# Altium PCB J_TAG_PCB.PcbDoc
Units mm, origin at the board's own origin, x right, y up, seen from the top; angles counter-clockwise.
Board outline 118.25 x 45 mm, 4 copper layers (Top Layer, Signal Layer 1, Signal Layer 2, Bottom Layer), stack 0.778 mm thick; 45 components, 42 nets, 217 pads, 110 vias.
Unrouted connection lines stored in the file: 70.
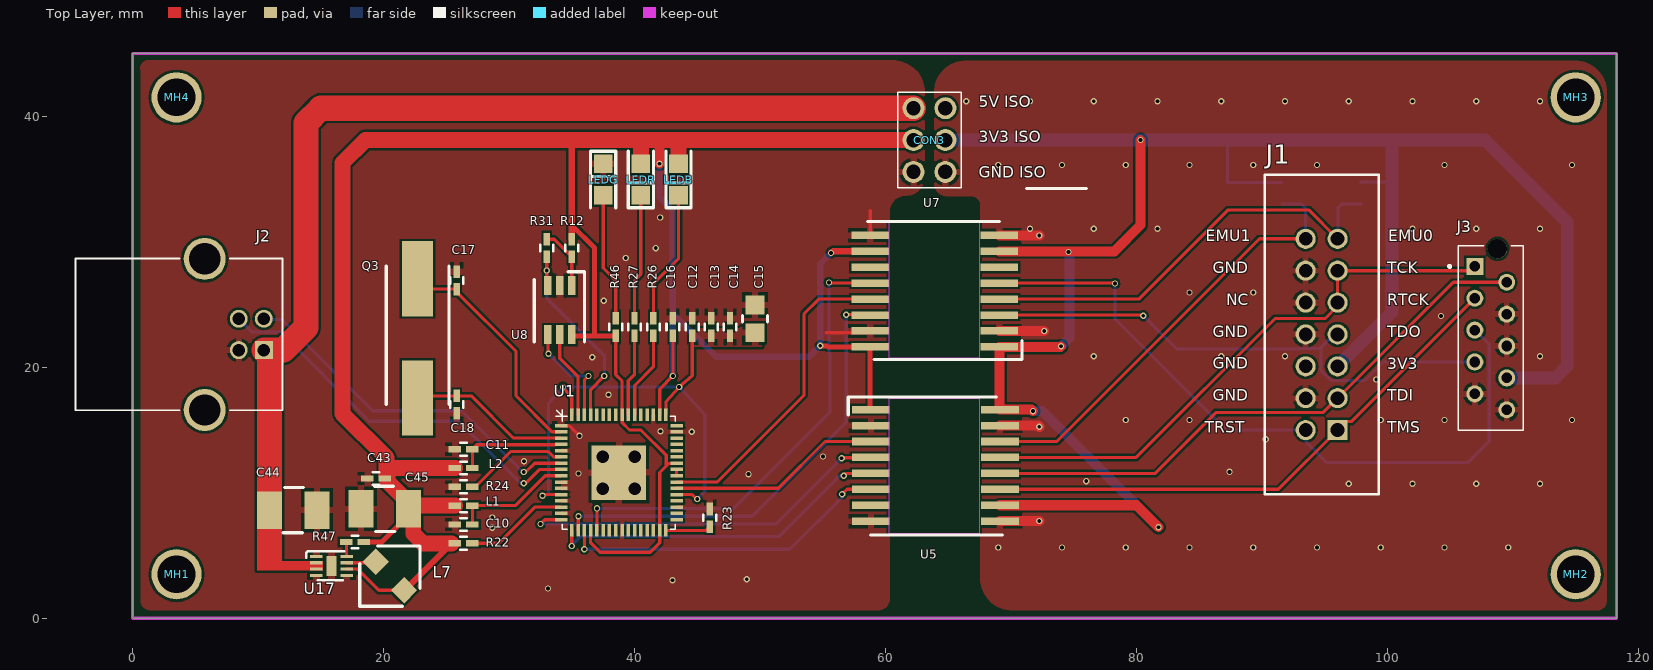
[diagram p0: Top Layer view]
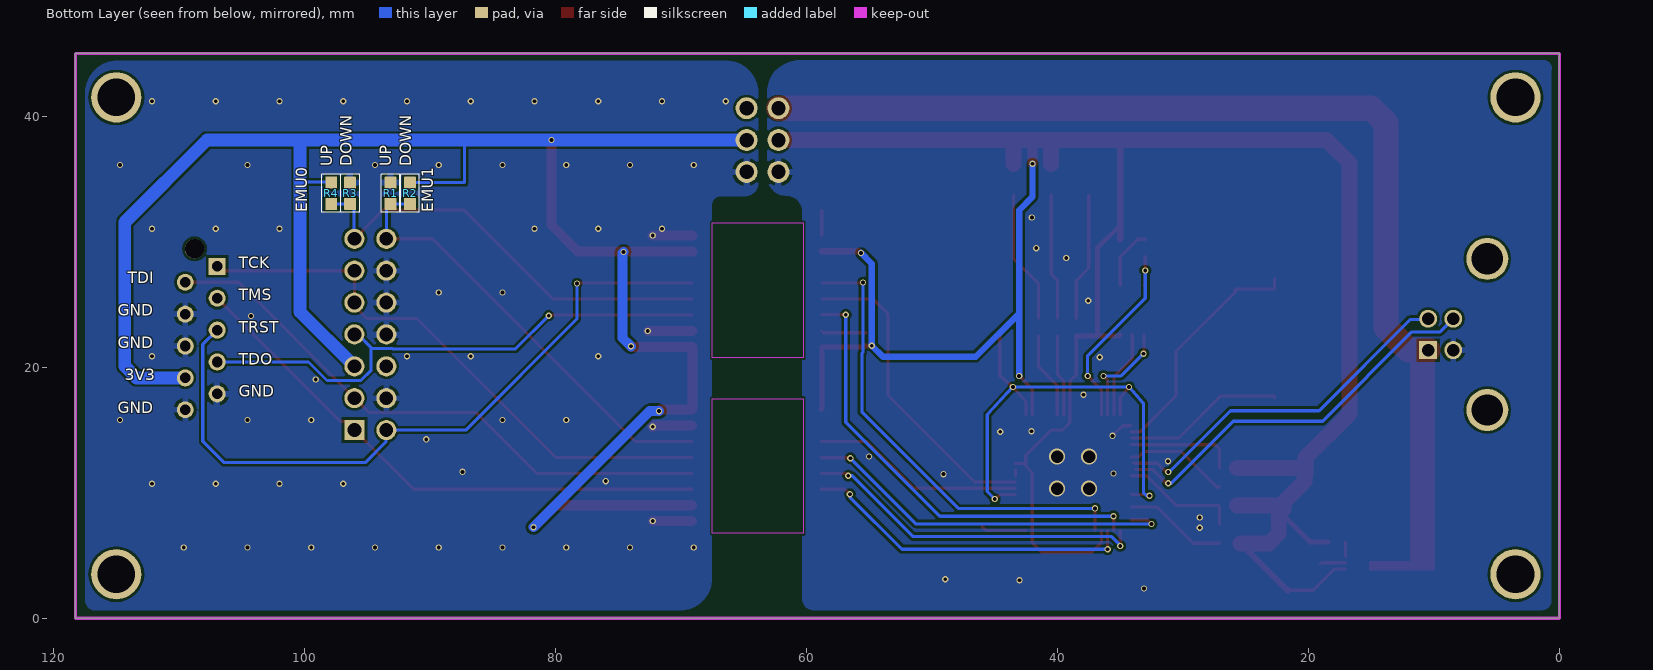
[diagram p1: Bottom Layer view, seen from below]
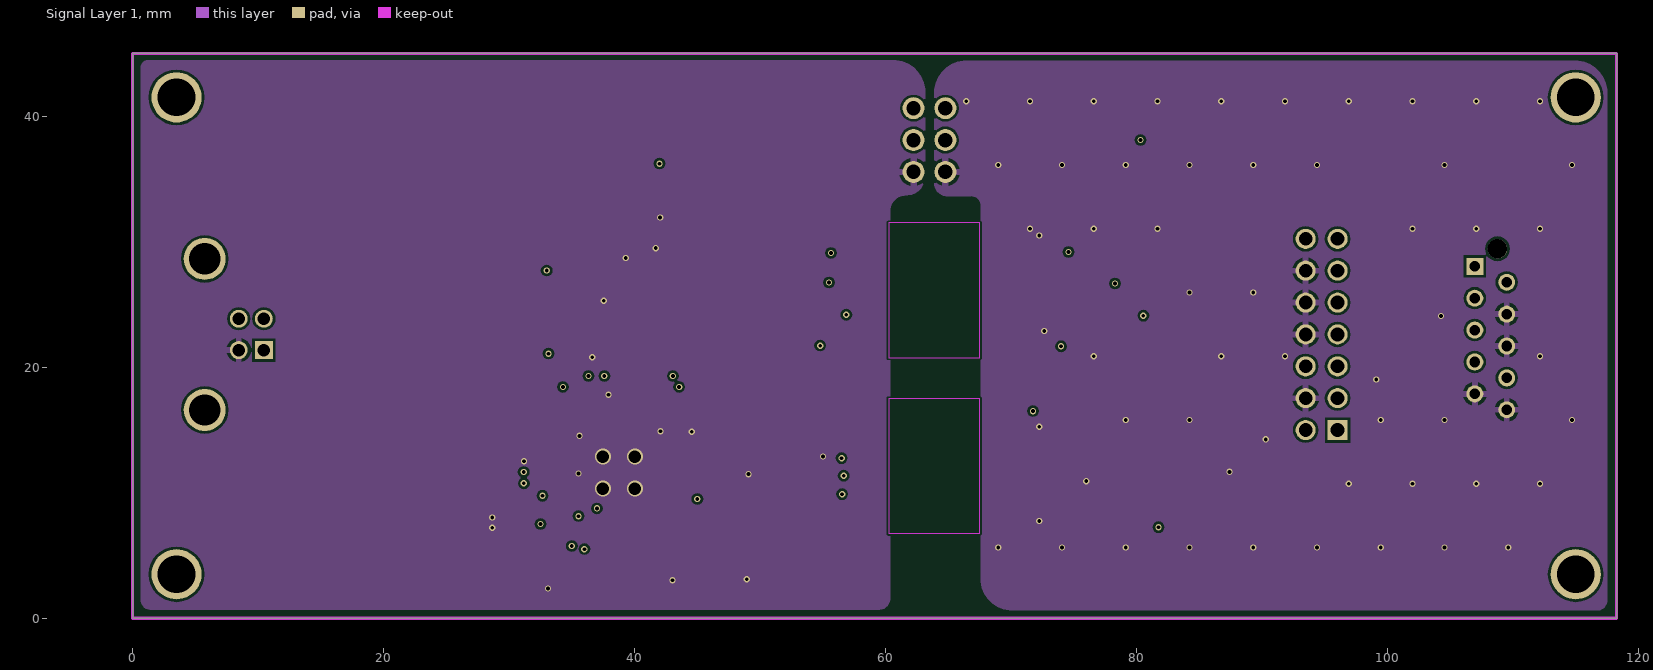
[diagram p2: Signal Layer 1]
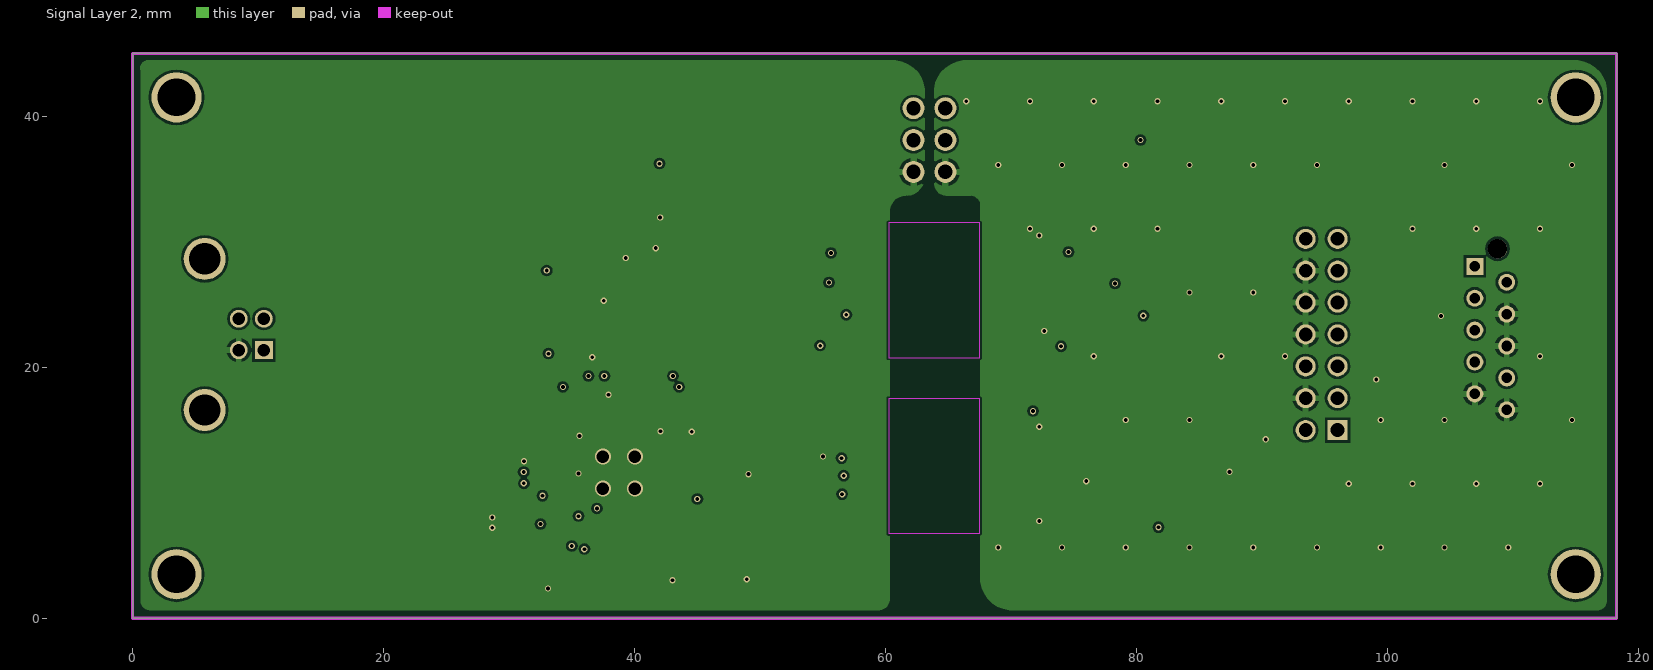
[diagram p3: Signal Layer 2]
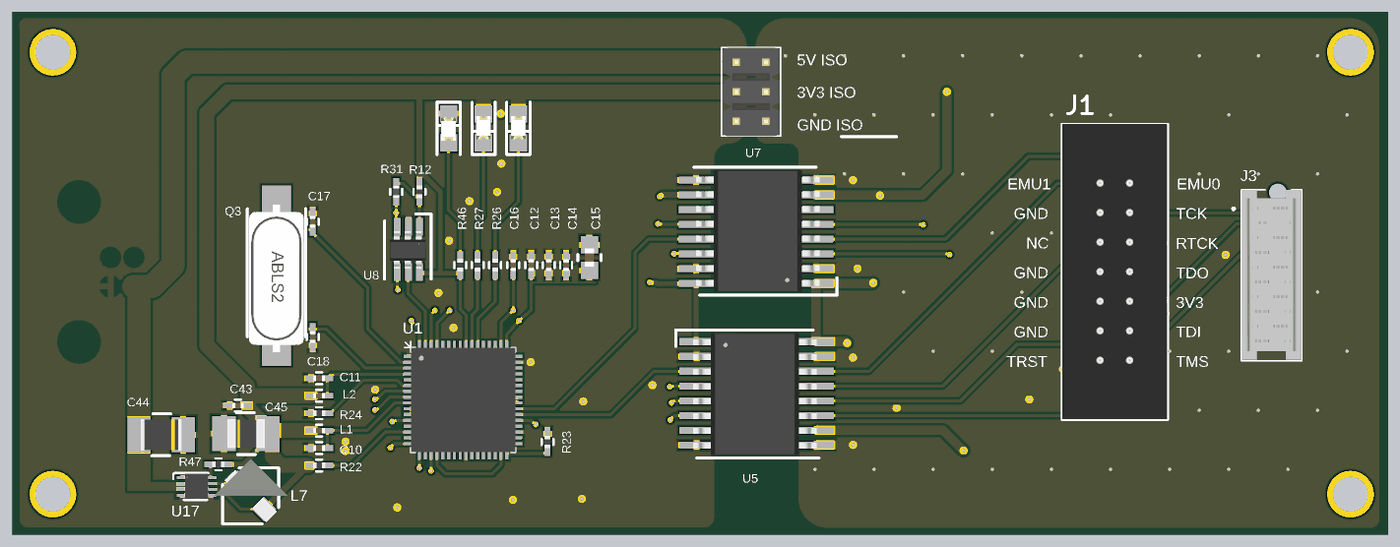
[diagram p4: 3D render of the assembled board from above, using the file's embedded part models]
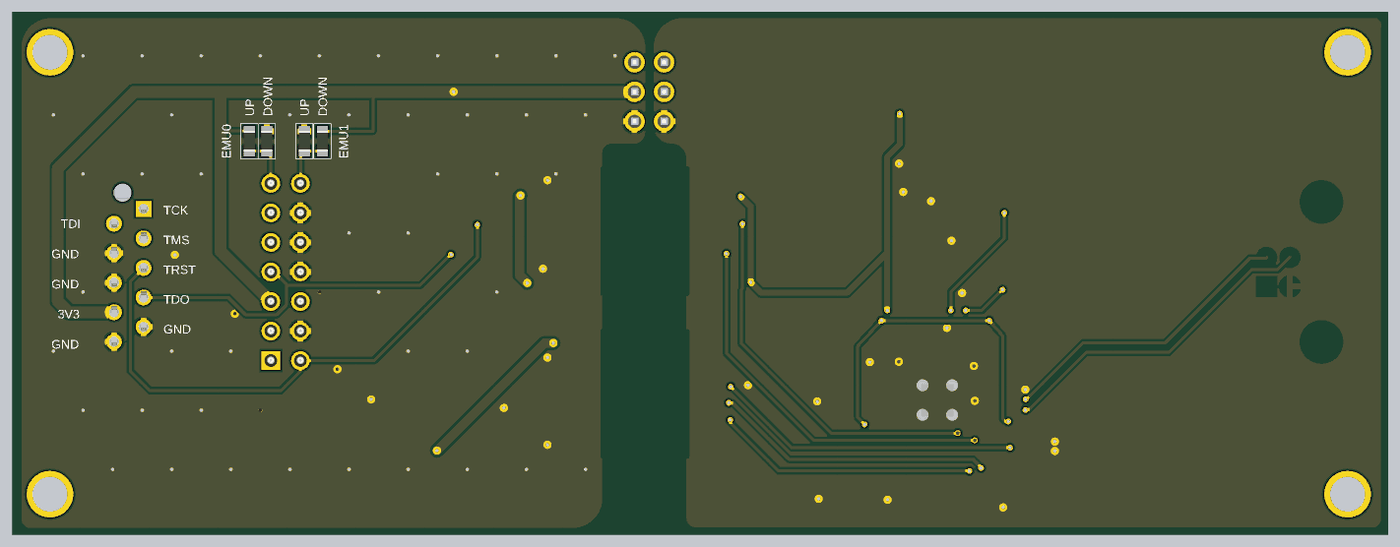
[diagram p5: 3D render of the assembled board from below, using the file's embedded part models]

## Layer stack, top to bottom
Top Solder: solder mask 0.0102, Solder Resist, Dk 3.5
Top Layer: signal copper 0.0356
Dielectric 1: core 0.254, FR-4, Dk 4.2
Signal Layer 1: signal copper 0.036
Dielectric 3: prepreg 0.127, Dk 4.2
Signal Layer 2: signal copper 0.036
Dielectric 2: core 0.254, Dk 4.2
Bottom Layer: signal copper 0.0356
Bottom Solder: solder mask 0.0102, Solder Resist, Dk 3.5

## Board outline
0,0 118.25,0 118.25,45 0,45

## Design rules (kind name [scope] priority, off if disabled: settings)
BoardOutlineClearance [All] p1: gap=0.2 ignorepadtopadclearanceinfootprint=FALSE except(0.4: Arc-SplitBarrior Arc-SplitContinuation Track-SplitBarrior Track-SplitContinuation SMDPad-SplitBarrior SMDPad-SplitContinuation THPad-SplitBarrior THPad-SplitContinuation Via-SplitBarrior Via-SplitContinuation Fill-SplitBarrior Fill-SplitContinuation Poly-SplitBarrior Poly-SplitContinuation Region-SplitBarrior Region-SplitContinuation Text-SplitBarrior Text-SplitContinuation)
Clearance "Clearance Bottom Layer" [OnLayer('Bottom Layer')] p1: gap=0.203 ignorepadtopadclearanceinfootprint=TRUE except(0.254: Arc-Text Track-Text SMDPad-Text THPad-Text Via-Text Fill-Text Poly-Text Region-Text Text-Text)
Clearance "Clearance Top Layer" [OnLayer('Top Layer')] p2: gap=0.203 ignorepadtopadclearanceinfootprint=TRUE except(0.254: Arc-Text Track-Text SMDPad-Text THPad-Text Via-Text Fill-Text Poly-Text Region-Text Text-Text)
Clearance [All] p3: gap=0.2 ignorepadtopadclearanceinfootprint=FALSE except(0.089: Arc-Arc Arc-Track Arc-SMDPad Track-Track Track-SMDPad SMDPad-SMDPad; 0.127: Arc-Via Track-Via SMDPad-Via THPad-Via Via-Via; 0.254: Arc-Text Track-Text SMDPad-Text THPad-Text Via-Text Fill-Text Poly-Text Region-Text Text-Text)
HoleSize [All] p1: absolutevalues=TRUE maxlimit=6.3 minlimit=0.2 maxpercent=80.000 minpercent=20.000
MinimumAnnularRing [All] p1: minimumring=0.076
MinimumSolderMaskSliver [All] p1: minsoldermaskwidth=0.1
PolygonConnect PolygonConnect_1 [All] p1: thpad.connectstyle=Relief thpad.reliefconductorwidth=0.508 thpad.reliefentries=4 thpad.polygonreliefangle="90 Angle" thpad.airgapwidth=0.254 smdpad.connectstyle=Relief smdpad.reliefconductorwidth=0.508 smdpad.reliefentries=4 smdpad.polygonreliefangle="90 Angle" smdpad.airgapwidth=0.254 via.connectstyle=Direct via.reliefconductorwidth=0.508 via.reliefentries=4 via.polygonreliefangle="90 Angle" via.airgapwidth=0.254
RoutingCorners [All] p1: cornerstyle=Round minsetback=2.54 maxsetback=2.54
RoutingVias [All] p1: holewidth=0.3 width=0.5 viastyle="Through Hole" minholewidth=0.3 minwidth=0.5 maxholewidth=0.3 maxwidth=0.5
SilkToSilkClearance [All] p1: silktosilkclearance=0.1
SilkToSolderMaskClearance [IsPad] p1: minsilkscreentomaskgap=0.1 clearancetoexposedcopper=TRUE
SolderMaskExpansion [All] p1: expansion=0.102
Width [All] p1: maxlimit=2.54 minlimit=0.089 preferedwidth=0.381
25 further rules are at their usual default settings.

## Classes and differential pairs
component class Konektori_SCH: CON3 J1 J3 R1 R2 R3 R4 usb
component class J_TAG_SCH: C10 C11 C12 C13 C14 C15 C16 C17 C18 C43 C44 C45 L1 L2 L7 LEDB LEDG LEDR MH1 MH2 MH3 MH4 Q3 R12 R22 R23 R24 R26 R27 R31 R46 R47 U1 U5 U7 U8 U17

## Components (designator, comment, footprint, x,y, rotation, side; value= is the part's Value field where it differs from the comment)
C10 "GRM155R60J475ME47D" GRM155R60J475ME47D 26.378,7.468 r0 top
C11 "GRM155R60J475ME47D" GRM155R60J475ME47D 26.378,13.468 r180 top
C12 "GRM155R61A104KA01D" GRM155R61A104KA01D 44.603,23.2 r270 top
C13 "GRM155R61A104KA01D" GRM155R61A104KA01D 46.103,23.2 r270 top
C14 "GRM155R61A104KA01D" GRM155R61A104KA01D 47.603,23.2 r270 top
C15 "C1608X5R1C335K080AC" C1608X5R1C335K080AC 49.603,23.85 r270 top
C16 "GRM155R61A104KA01D" GRM155R61A104KA01D 43.053,23.2 r270 top
C17 "GRM1555C1H360JA01D" GRM1555C1H360JA01D 25.832,26.924 r270 top
C18 "GRM1555C1H360JA01D" GRM1555C1H360JA01D 25.832,17.018 r90 top
C43 "GRM155R61A104KA01D" GRM155R61A104KA01D 19.406,11.125 r0 top
C44 "GRM32DR71E106KA12L" GRM32DR71E106KA12L 12.802,8.611 r180 top
C45 "GRM32ER61E226KE15L" GRM32ER61E226KE15L 20.096,8.712 r0 top
CON3 "87227-3" 87227-3 62.23,40.64 r270 top
J1 "ED10522-ND" 14_DIP_JTAG 94.75,22.611 r180 top
J2 "USB-B1HSB6" CON_RCPT_USB-B1HSB6 -7.552,25.831 r270 top
J3 "8-215079-0" CON_BTB_F_8-215079-0 106.96,28.037 r90 top
L1 "BLM15AG601SN1D" BLM15AG601SN1D 26.378,8.968 r0 top
L2 "BLM15AG601SN1D" BLM15AG601SN1D 26.378,11.968 r0 top
L7 "CDRH2D18/HPNP-2R2NC" CDRH2D18/HPNP-2R2NC 20.498,3.353 r135 top
LEDB "150080BS75000" 150080BS75000 43.5,35.006 r90 top
LEDG "150080VS75000" 150080VS75000 37.5,34.906 r270 top
LEDR "150080SS75000" 150080SS75000 40.5,35.006 r90 top
MH1 "3mm" MH_3MM 3.5,3.5 r0 top
MH2 "3mm" MH_3MM 115,3.5 r0 top
MH3 "3mm" MH_3MM 115,41.5 r0 top
MH4 "3mm" MH_3MM 3.5,41.5 r0 top
Q3 "ABLS2-12.000MHZ-D4Y-T" ABLS2-12.000MHZ-D4Y-T 22.708,22.047 r270 top
R1 "RC0603FR-071KL" SMD_0603_RES 93.142,33.858 r90 bottom
R2 "RC0603FR-071KL" SMD_0603_RES 91.592,33.858 r90 bottom
R3 "RC0603FR-071KL" SMD_0603_RES 96.368,33.858 r90 bottom
R4 "RC0603FR-071KL" SMD_0603_RES 97.866,33.858 r90 bottom
R12 "RC0402FR-0710KL" RC0402FR-0710KL 35,29.5 r90 top
R22 "RC0402FR-071KL" RC0402FR-071KL 26.378,5.968 r0 top
R23 "RC0402FR-071KL" RC0402FR-071KL 46,8 r90 top
R24 "RC0402FR-0712KL" RC0402FR-0712KL 26.378,10.468 r0 top
R26 "RC0402FR-07680RL" RC0402FR-07680RL 41.5,23.2 r90 top
R27 "RC0402FR-07680RL" RC0402FR-07680RL 40,23.2 r90 top
R31 "CRCW04022K20FKEDC" CRCW04022K20FKEDC 33,29.5 r90 top
R46 "RC0402FR-07680RL" RC0402FR-07680RL 38.5,23.2 r90 top
R47 "RC0402FR-07100KL" RC0402FR-07100KL 17.729,6.071 r0 top
U1 "FT2232HQ-REEL" FT2232HQ-REEL 38.75,11.6 r0 top
U5 "ISO7240CDWR" ISO7240CDWR 63.825,12.119 r0 top
U7 "ISO7231CDWR" ISO7231CDWR 64.075,26.119 r180 top
U8 "93LC56BT-I/OT" 93LC56BT-I/OT 34,24.5 r270 top
U17 "TPS62162DSGT" TPS62162DSGT 15.85,4.216 r0 top

## Footprints (in the part's own frame and the unit in brackets; to place one, negate y for a bottom-side part, rotate by r counter-clockwise, add the part's x,y. Pads: shape width x height; smd on the part's side, far side on the other; paste and mask are expansions set on the pad)
14_DIP_JTAG [mm]
  rect 1.6x1.6 hole 1.1: 1(-1.27,7.62)
  round 1.6 hole 1.1: 2(1.27,7.62) 3(-1.27,5.08) 4(1.27,5.08) 5(-1.27,2.54) 6(1.27,2.54) 7(-1.27,0) 8(1.27,0) 9(-1.27,-2.54) 10(1.27,-2.54) 11(-1.27,-5.08) 12(1.27,-5.08) 13(-1.27,-7.62) 14(1.27,-7.62)
  silkscreen extent -4.55,-12.72 4.55,12.72, body extent -4.5,-12.72 4.5,12.67, height 9.1
93LC56BT-I/OT [mm] "IC EEPROM 2K SPI 2MHZ SOT23-6"
  rect 1.5x0.6 smd: CLK(1.9,-0.9) CS(1.9,0.05) DI(-2,-0.9) DO(-2,1) VCC(1.9,1) VSS(-2,0.05)
  silkscreen extent -3.1,-2 2.5,2, body extent -1.6,-1.55 1.6,1.55, height 1.45
87227-3 [mm] "CONN HEADER VERT 6POS 2.54MM"
  round 1.75 hole 1.15: 1(0,0) 2(0,2.54) 3(2.54,0) 4(2.54,2.54) 5(5.08,0) 6(5.08,2.54)
  silkscreen extent -1.27,-1.27 6.35,3.81, body extent -1.27,-1.14 6.35,3.68, height 8.59
150080BS75000 [mm] "LED BLUE CLEAR 0805 SMD"
  rect 1.5x1.5 smd: A(1.2,0) K(-1.3,0)
  silkscreen extent -2.3,-1 2.2,1, body extent -1,-0.62 1,0.63, height 0.7
150080SS75000 [mm] "LED RED CLEAR 0805 SMD"
  rect 1.5x1.5 smd: A(1.2,0) K(-1.3,0)
  silkscreen extent -2.3,-1 2.2,1, body extent -1,-0.62 1,0.63, height 0.7
150080VS75000 [mm] "LED GREEN CLEAR 0805 SMD"
  rect 1.5x1.5 smd: A(1.2,0) K(-1.3,0)
  silkscreen extent -2.3,-1 2.2,1, body extent -1,-0.62 1,0.63, height 0.7
ABLS2-12.000MHZ-D4Y-T [mm] "CRYSTAL 12.0000MHZ 18PF SMD"
  rect 6x2.5 smd: 1(-5,0) 2(4.5,0)
  silkscreen extent -6,-2.5 5,2.5, body extent -6.35,-2.35 6.35,2.35, height 3.16
BLM15AG601SN1D [mm] "FERRITE BEAD 600 OHM 0402 1LN"
  rect 1x0.5 smd: 1(-0.7,0) 2(0.7,0)
  silkscreen extent -0.25,-0.51 0.25,0.51, body extent -0.5,-0.25 0.5,0.25, height 0.55
C1608X5R1C335K080AC [mm] "CAP CER 3.3UF 16V X5R 0603"
  rect 1.5x1.5 smd: 1(-1.1,0) 2(1.1,0)
  silkscreen extent -0.25,-1 0.26,1, body extent -0.8,-0.4 0.8,0.4, height 0.9
CDRH2D18/HPNP-2R2NC [mm] "FIXED IND 2.2UH 1.9A 60 MOHM SMD"
  rect 1.5x1.5 smd: 1(-1.6,0) 2(1.6,0)
  silkscreen extent -2.4,-3.4 2.4,3.4, body extent -2.55,-0.65 2.55,0.65, height 1.51
CON_BTB_F_8-215079-0 [mm]
  rect 1.358x1.358 hole 0.85: 1(0,0)
  round 1.358 hole 0.85: 2(-1.27,-2.54) 3(-2.54,0) 4(-3.81,-2.54) 5(-5.08,0) 6(-6.35,-2.54) 7(-7.62,0) 8(-8.89,-2.54) 9(-10.16,0) 10(-11.43,-2.54)
  round 1.55 hole 1.55 unplated: ""(1.4,-1.8)
  silkscreen extent -13.07,-3.87 1.64,2.11, body extent -12.97,-3.74 1.64,1.26, height 4.2
CON_RCPT_USB-B1HSB6 [mm]
  rect 1.428x1.428 hole 1: 1(4.47,18.01)
  round 1.428 hole 1: 2(1.97,18.01) 3(1.97,16.01) 4(4.47,16.01)
  round 3.346 hole 2.5: P1(-2.8,13.3) P2(9.24,13.3)
  silkscreen extent -2.83,3 9.27,19.5, body extent -4.12,3.15 10.72,19.65, height 10.9
CRCW04022K20FKEDC [mm] "RES SMD 2.2K OHM 1% 1/16W 0402"
  rect 1x0.5 smd: 1(-0.7,0) 2(0.7,0)
  silkscreen extent -0.25,-0.51 0.25,0.51, body extent -0.5,-0.25 0.5,0.25, height 0.35
FT2232HQ-REEL [mm] "IC USB HS DUAL UART/FIFO 64-QFN"
  rect 0.28x1 smd mask+0.06: ACBUS0(0.75,-4.6) ACBUS1(1.25,-4.6) ACBUS2(1.75,-4.6) ACBUS3(2.25,-4.6) ACBUS4(2.75,-4.6) ACBUS5(3.75,-4.6) ADBUS1(-3.75,-4.6) ADBUS2(-3.25,-4.6) ADBUS3(-2.75,-4.6) ADBUS4(-1.75,-4.6) ADBUS5(-1.25,-4.6) ADBUS6(-0.75,-4.6) ADBUS7(-0.25,-4.6) BCBUS1(2.25,4.6) BCBUS2(1.75,4.6) BCBUS3(1.25,4.6) BCBUS4(0.75,4.6) BCBUS5(-0.25,4.6) BCBUS6(-0.75,4.6) BCBUS7(-1.25,4.6) EECLK(-2.75,4.6) EECS(-3.25,4.6) EEDATA(-2.25,4.6) GND5(0.25,-4.6) GND8(2.75,4.6) PWREN#(-1.75,4.6) VCCIO1(-2.25,-4.6) vccio2(3.25,-4.6) VCCIO4(0.25,4.6) VCORE3(-3.75,4.6) VREGIN(3.25,4.6) VREGOUT(3.75,4.6)
  rect 1x0.28 smd mask+0.06: ACBUS6(4.6,-3.75) ACBUS7(4.6,-3.25) ADBUS0(-4.6,-3.75) AGND(-4.6,-0.75) BCBUS0(4.6,3.75) BDBUS0(4.6,-1.25) BDBUS1(4.6,-0.75) BDBUS2(4.6,-0.25) BDBUS3(4.6,0.25) BDBUS4(4.6,1.25) BDBUS5(4.6,1.75) BDBUS6(4.6,2.25) BDBUS7(4.6,2.75) GND1(-4.6,3.75) GND2(-4.6,1.75) GND3(-4.6,-1.25) GND4(-4.6,-3.25) GND6(4.6,-2.75) GND7(4.6,3.25) OSCI(-4.6,3.25) OSCO(-4.6,2.75) REF(-4.6,1.25) RESET#(-4.6,-2.75) SUSPEND#(4.6,-2.25) TEST(-4.6,-2.25) USBDM(-4.6,0.75) USBDP(-4.6,0.25) VCCIO3(4.6,0.75) VCORE1(-4.6,-1.75) VCORE2(4.6,-1.75) VPHY(-4.6,2.25) VPLL(-4.6,-0.25)
  rect 4.35x4.35 smd paste-3 mask+0.06: TH(0,0)
  silkscreen extent -5.02,-4.5 4.5,5.02, body extent -4.5,-4.5 4.5,4.5, height 0.89
GRM32DR71E106KA12L [mm] "CAP CER 10UF 25V X7R 1210"
  rect 2x3 smd: 1(-1.9,0) 2(1.9,0)
  silkscreen extent -0.82,-1.8 0.8,1.8, body extent -1.75,-1.35 1.75,1.35, height 2.21
GRM32ER61E226KE15L [mm] "CAP CER 22UF 25V X5R 1210"
  rect 2x3 smd: 1(-1.9,0) 2(1.9,0)
  silkscreen extent -0.82,-1.8 0.8,1.8, body extent -1.6,-1.24 1.6,1.25, height 2.79
GRM155R60J475ME47D [mm] "CAP CER 4.7UF 6.3V X5R 0402"
  rect 1x0.5 smd: 1(-0.7,0) 2(0.7,0)
  silkscreen extent -0.25,-0.51 0.25,0.51, body extent -0.5,-0.25 0.5,0.25, height 0.6
GRM155R61A104KA01D [mm] "CAP CER 0.1UF 10V X5R 0402"
  rect 1x0.5 smd: 1(-0.7,0) 2(0.7,0)
  silkscreen extent -0.25,-0.51 0.25,0.51, body extent -0.5,-0.25 0.5,0.25, height 0.55
GRM1555C1H360JA01D [mm] "CAP CER 36PF 50V C0G/NP0 0402"
  rect 1x0.5 smd: 1(-0.7,0) 2(0.7,0)
  silkscreen extent -0.25,-0.51 0.25,0.51, body extent -0.5,-0.25 0.5,0.25, height 0.55
ISO7231CDWR [mm] "Izolator"
  rect 3x0.6 smd: EN1(-5,-3.12) EN2(5.3,-3.12) GND1(-5,3.23) GND1(-5,-4.39) GND2(5.3,3.23) GND2(5.3,-4.39) INA(-5,1.96) INB(-5,0.69) INC(5.3,-0.58) NC1(-5,-1.85) NC2(5.3,-1.85) OUTA(5.3,1.96) OUTB(5.3,0.69) OUTC(-5,-0.58) VCC1(-5,4.5) VCC2(5.3,4.5)
  silkscreen extent -6.8,-5.5 5.5,5.5, body extent -5.32,-5.24 5.32,5.25, height 2.64
ISO7240CDWR [mm] "Izolator"
  rect 3x0.6 smd: EN(5.3,-3.12) GND1(-5,-4.39) GND1(-5,3.23) GND2(5.3,-4.39) GND2(5.3,3.23) INA(-5,1.96) INB(-5,0.69) INC(-5,-0.58) IND(-5,-1.85) NC(-5,-3.12) OUTA(5.3,1.96) OUTB(5.3,0.69) OUTC(5.3,-0.58) OUTD(5.3,-1.85) VCC1(-5,4.5) VCC2(5.3,4.5)
  silkscreen extent -6.8,-5.5 5.5,5.5, body extent -5.32,-5.24 5.32,5.25, height 2.64
MH_3MM [mm]
  round 4 hole 3: ""(0,0)
RC0402FR-071KL [mm] "RES SMD 1K OHM 1% 1/16W 0402"
  rect 1x0.5 smd: 1(-0.7,0) 2(0.7,0)
  silkscreen extent -0.25,-0.51 0.25,0.51, body extent -0.53,-0.25 0.53,0.25, height 0.71
RC0402FR-0710KL [mm] "RES SMD 10K OHM 1% 1/16W 0402"
  rect 1x0.5 smd: 1(-0.7,0) 2(0.7,0)
  silkscreen extent -0.25,-0.51 0.25,0.51, body extent -0.53,-0.25 0.53,0.25, height 0.71
RC0402FR-0712KL [mm] "RES SMD 12K OHM 1% 1/16W 0402"
  rect 1x0.5 smd: 1(-0.7,0) 2(0.7,0)
  silkscreen extent -0.25,-0.51 0.25,0.51, body extent -0.53,-0.25 0.53,0.25, height 0.71
RC0402FR-07100KL [mm] "RES SMD 100K OHM 1% 1/16W 0402"
  rect 1x0.5 smd: 1(-0.7,0) 2(0.7,0)
  silkscreen extent -0.25,-0.51 0.25,0.51, body extent -0.53,-0.25 0.53,0.25, height 0.71
RC0402FR-07680RL [mm] "RES SMD 680 OHM 1% 1/16W 0402"
  rect 1x0.5 smd: 1(-0.7,0) 2(0.7,0)
  silkscreen extent -0.25,-0.51 0.25,0.51, body extent -0.53,-0.25 0.53,0.25, height 0.71
SMD_0603_RES [mm]
  rrect10% 0.95x0.95 smd: 1(-0.85,0) 2(0.85,0)
  silkscreen extent -1.5,-0.75 1.5,0.75, body extent -0.87,-0.48 0.87,0.47, height 0.55
TPS62162DSGT [mm] "DC-DC Buck"
  rect 1x0.25 smd mask+0.06: AGND(-1.2,-0.8) EN(-1.2,-0.3) FB(1.2,-0.8) PG(1.2,0.7) PGND(-1.2,0.7) SW(1.2,0.2) VIN(-1.2,0.2) VOS(1.2,-0.3)
  rect 0.8x1.6 smd: EX_PAD(0,-0.05)
  silkscreen extent -2,-1.2 1,1.1, body extent -1.05,-1.05 1.05,1.05, height 0.8

## Part data
C10 C11: "C10, C11", Supplier Part Number 1=490-5915-1-ND, Supplier 1=Digi-Key
C12 C13 C14 C16 C43: "C12, C13, C14, C16, C43", Supplier Part Number 1=490-1318-6-ND, Supplier 1=Digi-Key
C15: "C15", Supplier Part Number 1=445-7476-6-ND, Supplier 1=Digi-Key
C17 C18: "C17, C18", Supplier Part Number 1=490-6044-6-ND, Supplier 1=Digi-Key
C44: "C41, C44, 10u", Supplier Part Number 1=490-1867-6-ND, Supplier 1=Digi-Key
C45: "C45", Supplier Part Number 1=490-3889-6-ND, Supplier 1=Digi-Key
CON3: "Heder, 3x2, M", Supplier Part Number 1=A26569-ND, Supplier 1=Digi-Key
J1: library part "CONN_JTAG_Boxheader 14-pol", "CONN HEADER VERT 14POS 2.54MM", Color=Black, Manufacturer="On-Shore Technology", Manufacturer Part Number=302-S141, Category=Connectors, ComponentLink1Description=https://datasheet.ciiva.com/742/302-sxxx-742188.pdf?src-supplier=Digi-Key, ComponentLink1URL=https://datasheet.ciiva.com/742/302-sxxx-742188.pdf?src-supplier=Digi-Key, Connector Type="Male Pin", Contact Plating=Gold, Mount="Through Hole", Number of Positions=14, Number of Rows=2, Packaging=Tray, Pitch=0.1inch, Pricing 1="1=0,32000, 10=0,27400, 200=0,21280, 600=0,18240, 1000=0,15200, 5000=0,13029, 10000=0,12160 (USD)", RoHS=Yes, Row Spacing=0.1inch, Stock 1=34434, Supplier 1=Digi-Key, Supplier Part Number 1=ED10522-ND, Termination=Solder
J2: library part CON_RCTB_USB-B1HSB6, "CONN RCPT TYPEB 4POS R/A", Manufacturer="On-Shore Technology", Package Quantity=50, Supplier Part Number 1=ED2983-ND, Category=Connectors, ComponentLink1Description=https://datasheet.ciiva.com/851/usb-b1hsxx-851167.pdf?src-supplier=Digi-Key, ComponentLink1URL=https://datasheet.ciiva.com/851/usb-b1hsxx-851167.pdf?src-supplier=Digi-Key, Connector Type=USB, Gender=Receptacle, Manufacturer Part Number=USB-B1HSB6, Mount="Through Hole,Horizontal", Number of Contacts=4, Packaging=Tray, Pricing 1="1=0,61000, 10=0,53300, 25=0,48720, 40=0,45875, 117=0,43957, 234=0,40132, 468=0,38220, 1053=0,31532, 2457=0,28665 (USD)", RoHS=Yes, Stock 1=7174, Supplier 1=Digi-Key
J3: library part CON_BTB_F_8-215079-0, "CONN FMALE-ON-BRD 10POS VERT T/H", Color=Red, Contact Current Rating=1.5A, Contact Resistance=10mR, Flammability Rating="UL94 V-0", Insulation Resistance=1GR, Manufacturer="TE Connectivity", Max Operating Temperature=105°C, Min Operating Temperature=-40°C, Package Quantity=250, Supplier Part Number 1=A99470CT-ND, Voltage Rating=230V, Voltage Rating (DC)=100V, Board Standoff="No (Without)", Category="Headers and Wire Housings", ComponentLink1Description=https://datasheet.ciiva.com/11745/0900766b8101108b-11745837.pdf?src-supplier=RSComponents, ComponentLink1URL=https://datasheet.ciiva.com/11745/0900766b8101108b-11745837.pdf?src-supplier=RSComponents, ComponentLink2Description=https://datasheet.ciiva.com/5723/493968-5723952.pdf?src-supplier=Farnell, ComponentLink2URL=https://datasheet.ciiva.com/5723/493968-5723952.pdf?src-supplier=Farnell, ComponentLink3Description=https://datasheet.ciiva.com/25908/eng-cs-82012-ribbon-cable-interconnect-sol-0412-25908056.pdf?src-supplier=Avnet+Europe, ComponentLink3URL=https://datasheet.ciiva.com/25908/eng-cs-82012-ribbon-cable-interconnect-sol-0412-25908056.pdf?src-supplier=Avnet+Europe, ComponentLink4Description=https://datasheet.ciiva.com/30057/eng-cat-889409-0699-96-30057720.pdf?src-supplier=Onlinecomponents.com, ComponentLink4URL=https://datasheet.ciiva.com/30057/eng-cat-889409-0699-96-30057720.pdf?src-supplier=Onlinecomponents.com, ComponentLink5Description=https://datasheet.ciiva.com/754/eng-cd-215079-y-754233.pdf?src-supplier=Digi-Key, ComponentLink5URL=https://datasheet.ciiva.com/754/eng-cd-215079-y-754233.pdf?src-supplier=Digi-Key, ComponentLink6Description=https://datasheet.ciiva.com/14156/mo215079-128482-90-dat-en-14156698.pdf?src-supplier=Distrelec, ComponentLink6URL=https://datasheet.ciiva.com/14156/mo215079-128482-90-dat-en-14156698.pdf?src-supplier=Distrelec, ComponentLink7Description=https://datasheet.ciiva.com/754/eng-cd-215079-y-754187.pdf?src-supplier=Digi-Key, ComponentLink7URL=https://datasheet.ciiva.com/754/eng-cd-215079-y-754187.pdf?src-supplier=Digi-Key, ComponentLink8Description=https://datasheet.ciiva.com/43491/747833-da-01-en-federleiste-gerade-10pol-43491941.pdf?src-supplier=Conrad, ComponentLink8URL=https://datasheet.ciiva.com/43491/747833-da-01-en-federleiste-gerade-10pol-43491941.pdf?src-supplier=Conrad, Connector System=Board-to-Board, Connector Type=Receptacle,Connector,Pin, Contact Material=Bronze, Contact Plating=Tin, Contact Post Length=0.122inch, Current Rating=1.5A, Depth=5.1mm, ELV=Compliant, Fastening Type=Push,Pull, Gender=Receptacle, Height=0.16inch, Housing Color=Red, Housing Material=Polyester, Insulation Color=Red, Insulation Material=PBT, Length=14.7mm, Manufacturer Part Number=8-215079-0, Mating Alignment="No (Without)", Mating Retention="No (Without)", Mount="Through Hole", Number of Contacts=10, Number of Pins=10, Number of Positions=10, Number of Rows=2, Orientation=Straight, Packaging=Box, PCB Mount Alignment="No (Without)", PCB Mount Retention=With, PCB Mounting Orientation=Vertical, Pitch=0.05inch, Plating Thickness=0.005um, Pricing 1="1=1.51000, 10=1.37400, 100=1.17800 (USD)", Radiation Hardening=No, REACH SVHC="No SVHC", RoHS=Yes, Row Spacing=0.1inch, Shrouded="Yes (With)", Stock 1=3227, Supplier 1=Digi-Key, Termination="Through Hole", Width=14.7mm, Working Voltage=100V
L1 L2: "L1, L2", Supplier Part Number 1=490-1006-6-ND, Supplier 1=Digi-Key
L7: "L7", Supplier Part Number 1=308-2295-6-ND, Supplier 1=Digi-Key
LEDB: library part 150080BS75000onent_1, "BLUE LED", Supplier Part Number 1=732-4982-6-ND, Supplier 1=Digi-Key
LEDG: "GREEN LED", Supplier Part Number 1=732-4986-6-ND, Supplier 1=Digi-Key
LEDR: "RED LED", Supplier Part Number 1=732-4985-6-ND, Supplier 1=Digi-Key
MH1 MH2 MH3 MH4: library part TH_3MM, "odsojnik"
Q3: "Oscilator 12MHz", Supplier Part Number 1=535-9869-6-ND, Supplier 1=Digi-Key
R1 R2 R3 R4: library part RES_0603_1K_1%_1/10W, "RES SMD 1K OHM 1% 1/10W 0603", Case Code (Imperial)=0603, Case Code (Metric)=1608, Manufacturer=Yageo, Max Operating Temperature=155°C, Max Power Dissipation=100mW, Min Operating Temperature=-55°C, Resistance=1kR, Resistance Tolerance=1%, Resistor Type="Thick Film", Supplier Part Number 1=311-1.00KHRCT-ND, Temperature Coefficient=100ppm/°C, Voltage Rating=50V, Case/Package=0603, Category="Chip SMD Resistors", ComponentLink1Description=https://datasheet.ciiva.com/11808/0900766b80f96399-11808081.pdf?src-supplier=RSComponents, ComponentLink1URL=https://datasheet.ciiva.com/11808/0900766b80f96399-11808081.pdf?src-supplier=RSComponents, ComponentLink2Description=https://datasheet.ciiva.com/25906/pyu-rc0603-51-rohs-l-4-25906933.pdf?src-supplier=Avnet+Europe, ComponentLink2URL=https://datasheet.ciiva.com/25906/pyu-rc0603-51-rohs-l-4-25906933.pdf?src-supplier=Avnet+Europe, ComponentLink3Description=https://datasheet.ciiva.com/7660/1868787-7660790.pdf?src-supplier=Element14, ComponentLink3URL=https://datasheet.ciiva.com/7660/1868787-7660790.pdf?src-supplier=Element14, ComponentLink4Description=https://datasheet.ciiva.com/7746/1738695-7746279.pdf?src-supplier=Element14, ComponentLink4URL=https://datasheet.ciiva.com/7746/1738695-7746279.pdf?src-supplier=Element14, ComponentLink5Description=https://datasheet.ciiva.com/7746/1686128-7746280.pdf?src-supplier=Element14, ComponentLink5URL=https://datasheet.ciiva.com/7746/1686128-7746280.pdf?src-supplier=Element14, ComponentLink6Description=https://datasheet.ciiva.com/28386/pyu-rc0603-51-rohs-l-4-28386648.pdf?src-supplier=Avnet+Europe, ComponentLink6URL=https://datasheet.ciiva.com/28386/pyu-rc0603-51-rohs-l-4-28386648.pdf?src-supplier=Avnet+Europe, ComponentLink7Description=https://datasheet.ciiva.com/7746/1738695-7746281.pdf?src-supplier=Element14, ComponentLink7URL=https://datasheet.ciiva.com/7746/1738695-7746281.pdf?src-supplier=Element14, ComponentLink8Description=https://datasheet.ciiva.com/8896/pyu-rc0603-51-rohs-l-4-8896106.pdf?src-supplier=Avnet, ComponentLink8URL=https://datasheet.ciiva.com/8896/pyu-rc0603-51-rohs-l-4-8896106.pdf?src-supplier=Avnet, ComponentLink9Description=https://datasheet.ciiva.com/15189/getdatasheetpartid-404327-15189644.pdf?src-supplier=Verical, ComponentLink9URL=https://datasheet.ciiva.com/15189/getdatasheetpartid-404327-15189644.pdf?src-supplier=Verical, ComponentLink10Description=https://datasheet.ciiva.com/7983/443971-7983613.pdf?src-supplier=Element14, ComponentLink10URL=https://datasheet.ciiva.com/7983/443971-7983613.pdf?src-supplier=Element14, Construction=Rectangular, Contact Plating=Tin,Matte, Depth=0.8mm, Features="Moisture Resistant", Height=0.45mm, Lead Free="Lead Free", Length=1.6mm, Manufacturer Part Number=RC0603FR-071KL, Military Standard=Not, Number of Terminations=2, Packaging="Tape and Reel", Power Rating=100mW, Pricing 1="1=0.10000, 10=0.02300, 100=0.00930, 1000=0.00417, 2500=0.00362 (USD)", Radiation Hardening=No, REACH SVHC="No SVHC", RoHS=Yes, RoHS Compliant=Yes, Series=RC, Size Code=0603, Stock 1=24609199, Supplier 1=Digi-Key, Technology="THICK FILM", Termination=SMD/SMT, Tolerance=1%
R12: "R12, 10K", Supplier Part Number 1=311-10.0KLRDKR-ND, Supplier 1=Digi-Key
R22 R23: "R22, R23, 1K", Supplier Part Number 1=311-1.00KLRDKR-ND, Supplier 1=Digi-Key
R24: Supplier Part Number 1=311-12.0KLRDKR-ND, Supplier 1=Digi-Key
R26 R27 R46: "R26, R27, R46, RC0402FR-07680RL", Supplier Part Number 1=311-680LRDKR-ND, Supplier 1=Digi-Key
R31: "R31", Supplier Part Number 1=541-3971-6-ND, Supplier 1=Digi-Key
R47: "R47, 100K", Supplier Part Number 1=311-100KLRDKR-ND, Supplier 1=Digi-Key
U1: "IC kontroler", Supplier Part Number 1=768-1025-6-ND, Supplier 1=Digi-Key
U5: "Izolator", Supplier Part Number 1=296-38555-6-ND, Supplier 1=Digi-Key
U7: "Izolator", Supplier Part Number 1=296-38966-6-ND, Supplier 1=Digi-Key
U8: "IC memorija", Supplier Part Number 1=93LC56BT-I/OTDKR-ND, Supplier 1=Digi-Key
U17: "DC-DC Buck", Supplier Part Number 1=296-29897-1-ND, Supplier 1=Digi-Key

## Via types
v1: diameter 0.5, hole 0.3, Top Layer to Bottom Layer, 58 vias
v2: diameter 0.5, hole 0.3, Top Layer to Bottom Layer, tented both sides, 48 vias
v3: diameter 1.27, hole 1, Top Layer to Bottom Layer, 4 vias

## Nets (pads, with @x,y where several pads share a name; then routed paths per layer and width w, separated by ;. In a path a pad name is that pad's centre, name@x,y a point inside that pad or via, vN(x,y) a via of type N, cw(c..) or ccw(c..) an arc to the next point about the centre after c; other vN are vias at no path point)
+3V3: CON3.4 J1.5 J3.8 R2.2 R4.2 U5.EN U5.VCC2 U7.EN1 U7.VCC1 | length 165.7
  Top Layer w0.8: U7.EN1 78.239,29.239 80.325,31.325 80.325,38.091 v1(80.316,38.1) ; U5.EN 80.001,8.999 v1(81.75,7.25) ; v1(71.75,16.5) 71.631,16.619 U5.VCC2 69.075,16.669 U7.VCC1 73.943,21.619 v1(73.99,21.666)
  Bottom Layer w0.254: 87.249,38.1 87.249,34.708 R2.2 ; 91.592,38.024 91.669,38.1 ; 97.841,38.1 97.866,38.075 ; R4.2 97.905,34.747 100.355,34.747
  Bottom Layer w0.8: v1(71.75,16.5) 72.5,16.5 v1(81.75,7.25) ; v1(73.99,21.666) 74.651,22.327 74.651,29.108 v1(74.574,29.185)
  Bottom Layer w1.016: CON3.4 v1(80.316,38.1) 87.249,38.1 91.669,38.1 97.841,38.1 100.355,38.1 ; J1.5 100.355,24.407 100.355,34.747 100.355,38.1 ; J3.8 113.381,19.147 114.325,20.091 114.325,31.547 107.772,38.1 100.355,38.1
+5V: CON3.2 | length 0.1
  Top Layer w0.8: CON3.2 CON3.2@64.829,40.699
AGND: C10.1 C11.2 C12.1 C13.1 C14.1 C15.1 C16.1 C17.1 C18.1 C43.1 C44.1 C45.1 CON3.5 J2.4 LEDG.K R23.2 R24.1 U1.AGND U1.GND1 U1.GND2 U1.GND3 U1.GND4 U1.GND5 U1.GND6 U1.GND7 U1.GND8 U1.TEST U1.TH U5.GND1 U7.GND2 U8.VSS U17.AGND U17.EX_PAD U17.FB U17.PGND | length 7.4
  Top Layer w0.254: U1.GND1 34.163,15.337 34.803,15.337 v1(35.611,14.529) ; 55.25,22.75 58.636,22.75 U7.GND2@58.775,22.889 ; 58.75,32.5 58.775,32.475 U7.GND2@58.775,30.509
  other v1: 33.096,2.362 43.028,3.023 48.946,3.099 28.651,7.214 28.651,8.026 49.073,11.481 35.535,11.532 31.191,12.497 55.016,12.878 44.549,14.858 42.063,14.892 37.922,17.805 36.627,20.803 37.541,25.298 39.294,28.702 41.681,29.489 42.037,31.928
  other v3: 37.48,10.33 40.02,10.33 37.48,12.87 40.02,12.87
D+: J2.3 U1.USBDP | length 31.2
  Top Layer w0.254: v1(31.177,10.744) 31.322,10.744 32.419,11.842 U1.USBDP@33.791,11.842
  Bottom Layer w0.254: J2.3 9.502,22.817 11.752,22.817 18.872,15.697 25.984,15.697 30.937,10.744 v1(31.177,10.744)
D-: J2.2 U1.USBDM | length 28.8
  Top Layer w0.254: v1(31.166,11.651) 31.336,11.651 32.035,12.35 U1.USBDM@33.932,12.35
  Bottom Layer w0.254: J2.2 10.516,23.804 11.883,23.804 19.152,16.535 26.205,16.535 31.09,11.651 v1(31.166,11.651)
"FTDI 1V8": C12.2 C13.2 C14.2 C15.2 U1.VCORE1 U1.VCORE2 U1.VCORE3 U1.VREGOUT | length 41.7
  Top Layer w0.254: v1(32.664,9.754) 32.761,9.85 U1.VCORE1 ; v1(34.29,18.431) 35,17.568 U1.VCORE3 ; U1.VREGOUT 42.5,17.227 v1(43.552,18.431) 44.603,19.33 C12.2 ; U1.VCORE2 44.583,9.85 44.933,9.5 v1(45,9.5)
  Bottom Layer w0.254: v1(32.664,9.754) 32.893,9.754 33.147,10.008 33.147,17.136 v1(34.29,18.431) v1(43.552,18.431) 45.593,16.237 45.593,10.093 v1(45,9.5)
"FTDI 3V3": C16.2 C43.2 C45.2 CON3.3 L1.1 L2.1 L7.1 LEDB.A LEDR.A R12.2 R22.1 R46.1 R47.2 U1.VCCIO1 U1.vccio2 U1.VCCIO3 U1.VCCIO4 U1.VREGIN U5.VCC1 U7.EN2 U7.VCC2 U8.VCC U17.VOS | length 218.8
  Top Layer w0.254: U17.VOS 17.052,3.914 17.93,3.914 19.623,2.221 L7.1 ; U1.VCCIO1 36.5,6 37.25,5.25 41.25,5.25 42,6 U1.vccio2 42,11.607 42.52,12.127 ; R46.1 38.5,19.412 39,18.912 U1.VCCIO4 39.013,16.187 39.013,15.58 39.593,15 40.5,15 42.52,12.98 42.52,12.127 ; U1.VREGIN 42,18.251 v1(43.053,19.304) C16.2 ; U1.VCCIO3 43.337,12.337 42.73,12.337 42.52,12.127
  Top Layer w0.4: R47.2 19.855,6.071 22.252,8.468 C45.2@22.252,8.968 ; U8.VCC 35.1,22.5 36.8,22.5 ; 35,31.318 36.8,29.518 36.8,22.5 ; R46.1 36.8,22.5 ; v1(54.788,21.717) 54.807,21.698 55.322,21.698 55.401,21.619 U7.VCC2 58.775,16.669 U5.VCC1
  Top Layer w0.5: L7.1 21.682,2.221 25.428,5.968 R22.1
  Top Layer w0.508: 34.976,38.1 35,38.076 35,31.318 R12.2 ; v1(55.651,29.108) 55.728,29.185 55.778,29.185 55.833,29.239 U7.EN2
  Top Layer w0.762: v1(41.986,36.22) 41.986,38.1
  Top Layer w1.27: R22.1@25.428,5.968 23.14,5.968 22.361,6.747 22.361,8.859 C45.2@22.252,8.968 ; L1.1 C45.2@22.252,8.968 ; L2.1 20.756,11.968 20.244,11.455 ; LEDR.A 40.5,37.808 40.792,38.1 ; LEDB.A 43.5,37.882 43.282,38.1 ; CON3.3 43.282,38.1 ; 20.244,11.455 20.32,11.379 20.32,10.889 21.996,9.212 C45.2 C45.2@22.252,8.968 ; 20.244,11.455 20.244,12.776 16.713,16.307 16.713,36.271 18.542,38.1 34.976,38.1 40.792,38.1 ; 40.792,38.1 41.986,38.1 43.282,38.1
  Bottom Layer w0.508: v1(41.986,36.22) 41.986,33.586 43.053,32.519 43.053,24.282 ; v1(43.053,19.304) 43.053,24.282 ; v1(55.651,29.108) 54.788,28.245 v1(54.788,21.717) 53.899,20.828 46.507,20.828 43.053,24.282
"FTDI CLK": U1.EECLK U8.CLK | length 8.7
  Top Layer w0.254: U8.CLK 33.1,21.129 v1(33.147,21.082) ; U1.EECLK 36,18.982 v1(36.322,19.304)
  Bottom Layer w0.254: v1(33.147,21.082) 34.925,19.304 v1(36.322,19.304)
"FTDI CS": U1.EECS U8.CS | length 7
  Top Layer w0.254: U8.CS 34.036,22.586 34.036,20.701 35.5,19.237 U1.EECS
"FTDI DATA": R31.1 U1.EEDATA U8.DI | length 16.2
  Top Layer w0.254: R31.1 v1(33,27.7) 33,26.6 U8.DI ; U1.EEDATA 36.5,18.212 v1(37.592,19.304)
  Bottom Layer w0.254: v1(33,27.7) 33,25.5 37.592,20.908 v1(37.592,19.304)
GND: CON3.6 J1.4 J1.8 J1.10 J1.12 J3.4 J3.6 J3.9 J3.10 R1.2 R3.2 U5.GND2 U7.GND1 | length 13.1
  Top Layer w0.8: U7.GND1@69.075,22.889 v1(72.639,22.889) ; U7.GND1@69.075,30.509 72.25,30.509 v1(72.25,30.5) ; U5.GND2@69.125,7.729 72.229,7.729 ccw(c72.229,7.75) v1(72.25,7.75) ; U5.GND2@69.125,15.349 72.151,15.349 cw(c72.151,15.25) v1(72.25,15.25)
  other v1: 75.997,10.922 87.401,11.659 90.297,14.249 99.111,19.025 104.267,24.079
  other v2: 68.98,5.64 74.06,5.64 79.14,5.64 84.22,5.64 89.3,5.64 94.38,5.64 99.46,5.64 104.54,5.64 109.62,5.64 96.92,10.72 102,10.72 107.08,10.72 112.16,10.72 79.14,15.8 84.22,15.8 99.46,15.8 104.54,15.8 114.7,15.8 76.6,20.88 86.76,20.88 91.84,20.88 112.16,20.88 84.22,25.96 89.3,25.96 71.52,31.04 76.6,31.04 81.68,31.04 102,31.04 107.08,31.04 112.16,31.04 68.98,36.12 74.06,36.12 79.14,36.12 84.22,36.12 89.3,36.12 94.38,36.12 104.54,36.12 114.7,36.12 66.44,41.2 71.52,41.2 76.6,41.2 81.68,41.2 86.76,41.2 91.84,41.2 96.92,41.2 102,41.2 107.08,41.2 112.16,41.2
INA: U1.ADBUS0 U5.INB | length 30.3
  Top Layer w0.254: v1(32.5,7.5) 32.85,7.85 U1.ADBUS0 ; v1(56.5,12.75) 56.529,12.779 58.796,12.779 U5.INB
  Bottom Layer w0.254: v1(32.5,7.5) 51.25,7.5 v1(56.5,12.75)
INB: U1.ADBUS1 U5.INC | length 27.5
  Top Layer w0.254: v1(35,5.75) U1.ADBUS1 ; v1(56.667,11.354) 56.853,11.539 U5.INC
  Bottom Layer w0.254: v1(35,5.75) 35,5.817 35.683,6.5 51.5,6.5 56.354,11.354 v1(56.667,11.354)
INC: U1.ADBUS4 U7.INC | length 37.2
  Top Layer w0.254: U1.ADBUS4 v1(37,8.75) ; v1(55.499,26.746) 55.523,26.723 58.751,26.723 U7.INC
  Bottom Layer w0.254: v1(37,8.75) 47.891,8.75 55.584,16.443 55.584,21.089 55.499,21.175 v1(55.499,26.746)
"INC U5": U1.ADBUS3 U5.IND | length 26.5
  Top Layer w0.254: v1(36,5.5) U1.ADBUS3 ; v1(56.54,9.881) 56.929,10.269 U5.IND U5.IND@58.781,10.225
  Bottom Layer w0.254: v1(36,5.5) 52.388,5.5 56.54,9.652 v1(56.54,9.881)
"IND U5": U1.BDBUS0 U5.INA | length 17
  Top Layer w0.254: U1.BDBUS0 51.447,10.35 55.176,14.079 U5.INA
"JTAG TRST": J1.2 J3.5 U7.OUTC | length 57.2
  Top Layer w0.254: U7.OUTC 78.254,26.699 v1(78.283,26.67)
  Bottom Layer w0.254: v1(78.283,26.67) 78.283,23.851 87.142,14.991 J1.2 93.505,14.967 93.505,14.064 95.174,12.395 106.401,12.395 108.102,14.097 108.102,21.815 J3.5
NetC10_2: C10.2 L1.2 U1.VPLL | length 9.6
  Top Layer w0.254: C10.2 L1.2 30.497,8.968 32.879,11.35 U1.VPLL
NetC11_1: C11.1 L2.2 U1.VPHY | length 8.7
  Top Layer w0.254: L2.2 C11.1 27.43,13.82 33.66,13.82 33.677,13.837 34.137,13.837 U1.VPHY
NetC17_2: C17.2 Q3.1 U1.OSCI | length 19.2
  Top Layer w0.254: Q3.1 22.708,26.224 C17.2 25.832,25.974 30.556,21.25 30.556,17.704 33.41,14.85 U1.OSCI
NetC18_2: C18.2 Q3.2 U1.OSCO | length 13
  Top Layer w0.254: Q3.2 22.708,17.718 C18.2 26.986,17.718 30.354,14.35 U1.OSCO
NetL7_2: L7.2 U17.SW | length 2
  Top Layer w0.254: U17.SW 18.953,4.416 L7.2@19.05,4.318
NetLEDB_K: LEDB.K R26.2 | length 10.6
  Top Layer w0.254: R26.2 41.5,26.641 43.5,28.641 LEDB.K
NetLEDG_A: LEDG.A R46.2 | length 10.2
  Top Layer w0.254: LEDG.A 37.5,27.905 38.5,26.905 R46.2
NetLEDR_K: LEDR.K R27.2 | length 10
  Top Layer w0.254: R27.2 40,26.919 40.5,27.419 LEDR.K
NetR12_1: R12.1 R31.2 U8.DO | length 4.9
  Top Layer w0.254: R31.2 33.6,30.2 R12.1 U8.DO
NetR22_2: R22.2 U1.RESET# | length 8.3
  Top Layer w0.254: R22.2 29.18,5.968 32.062,8.85 U1.RESET#
NetR23_1: R23.1 U1.ACBUS5 | length 3.6
  Top Layer w0.254: U1.ACBUS5 45.7,7 R23.1
NetR24_2: R24.2 U1.REF | length 8.4
  Top Layer w0.254: R24.2 27.328,10.468 30.144,13.284 33.109,13.284 33.543,12.85 U1.REF
NetR26_1: R26.1 U1.BCBUS3 | length 6.9
  Top Layer w0.254: U1.BCBUS3@40.008,16.2 40.008,18.545 41.5,20.037 R26.1
NetR27_1: R27.1 U1.BCBUS4 | length 6.5
  Top Layer w0.254: U1.BCBUS4 39.5,18.926 40,19.426 R27.1
NetR47_1: R47.1 U17.PG | length 1.2
  Top Layer w0.254: R47.1 17.05,6.05 U17.PG
NetU1_BDBUS2: U1.BDBUS2 U1.BDBUS3 | length 0.5
  Top Layer w0.254: U1.BDBUS2 U1.BDBUS3
OUTA: U1.ADBUS2 U7.OUTA | length 36.1
  Top Layer w0.254: U1.ADBUS2 35.513,7.013 35.513,8.108 v1(35.536,8.131) ; v1(56.871,24.181) 56.894,24.204 58.729,24.204 U7.OUTA
  Bottom Layer w0.254: v1(35.536,8.131) 35.548,8.119 49.369,8.119 56.871,15.621 v1(56.871,24.181)
OUTB: U1.BDBUS1 U7.OUTB | length 25.3
  Top Layer w0.254: U1.BDBUS1 46.6,10.85 53.5,17.75 53.5,24.25 54.679,25.429 U7.OUTB
SCIARX: J1.14 R1.1 R2.1 U5.OUTA | length 35.5
  Top Layer w0.254: U5.OUTA 73.644,14.079 89.797,30.231 J1.14
  Bottom Layer w0.254: R2.1 R1.1 93.461,32.689 93.461,30.25 J1.14
SCIATX: J1.13 R3.1 R4.1 U7.INB | length 35.3
  Top Layer w0.254: U7.INB 80.191,25.429 87.3,32.537 93.714,32.537 J1.13
  Bottom Layer w0.254: J1.13 96.044,30.255 96.044,32.684 R3.1 R4.1
TCK: J1.9 J1.11 J3.1 U5.OUTB | length 45.8
  Top Layer w0.254: U5.OUTB 79.967,12.809 91.034,23.876 95.021,23.876 96.02,24.875 J1.9 J1.11 106.614,27.691 J3.1
TDI: J1.3 J3.2 U5.OUTC | length 46.7
  Top Layer w0.254: U5.OUTC 81.505,11.539 86.367,16.401 94.89,16.401 J1.3 105.256,26.767 J3.2
TDO: J1.7 J3.7 U7.INA | length 43.6
  Top Layer w0.254: U7.INA 80.489,24.159 v1(80.543,24.105)
  Bottom Layer w0.254: v1(80.543,24.105) 83.185,21.463 92.984,21.463 93.002,21.481 94.608,21.481 94.691,21.565 ; J1.7 95.738,22.611 94.691,21.565 ; J3.7 99.683,20.417 98.207,18.941 95.511,18.941 94.691,19.761 94.691,21.565
TMS: J1.1 J3.3 U5.OUTD | length 44.1
  Top Layer w0.254: U5.OUTD 91.298,10.269 J1.1 96.693,15.664 97.127,15.664 J3.3
USBVCC: C44.2 CON3.1 J2.1 U17.EN U17.VIN | length 82.2
  Top Layer w2: C44.2 10.902,20.918 J2.1 12.011,21.361 13.818,23.168 13.818,39.468 14.989,40.64 CON3.1
pads on no net: J1.6 J2.P1 J2.P2 J3. MH1. MH2. MH3. MH4. U1.ACBUS0 U1.ACBUS1 U1.ACBUS2 U1.ACBUS3 U1.ACBUS4 U1.ACBUS6 U1.ACBUS7 U1.ADBUS5 U1.ADBUS6 U1.ADBUS7 U1.BCBUS0 U1.BCBUS1 U1.BCBUS2 U1.BCBUS5 U1.BCBUS6 U1.BCBUS7 U1.BDBUS4 U1.BDBUS5 U1.BDBUS6 U1.BDBUS7 U1.PWREN# U1.SUSPEND# U5.NC U7.NC1 U7.NC2

## Polygon pours and split planes (outlines as drawn)
AGND on Top Layer "AGND_L01_P051" (solid, remove dead copper, pour order 51): 1.143,44.45 60.579,44.45 cw(c60.579,41.91) 63.119,41.91 63.119,35.179 cw(c61.595,35.179) 61.595,33.655 ccw(c61.595,32.385) 60.325,32.385 60.325,1.524 cw(c59.436,1.524) 59.436,0.635 1.397,0.635 cw(c1.397,1.397) 0.635,1.397 0.635,43.624 cw(c1.284,43.801) 1.107,44.45 2.032,44.45
GND on Top Layer "GND_L01_P059" (solid, remove dead copper, pour order 59): 63.88,41.888 cw(c66.42,41.888) 66.42,44.428 114.934,44.428 cw(c114.934,41.888) 117.474,41.888 117.474,1.375 cw(c116.712,1.375) 116.712,0.613 70.103,0.613 cw(c70.103,3.153) 67.563,3.153 67.563,32.871 ccw(c66.801,32.871) 66.801,33.633 64.896,33.633 cw(c64.896,34.649) 63.88,34.649
AGND on Top Layer "Top Layer-AGND" (solid, remove dead copper, pour order 49): 19.195,23.477 ccw(c21.735,23.477) 21.735,20.937 25.291,20.937 ccw(c25.291,23.477) 27.831,23.477 27.831,36.304 ccw(c25.672,36.304) 25.672,38.463 21.735,38.463 ccw(c21.735,35.923) 19.195,35.923
"FTDI 1V8" on Top Layer "Top Layer-FTDI 1V8" (solid, remove dead copper, pour order 14): 44.196,22.02 ccw(c44.603,22.02) 44.603,21.614 50.189,21.614 ccw(c50.189,22.098) 50.673,22.098 50.673,23.114 ccw(c50.038,23.114) 50.038,23.749 48.895,23.749 ccw(c48.895,23.368) 48.514,23.368 cw(c48.26,23.368) 48.26,23.114 44.323,23.114 ccw(c44.323,22.987) 44.196,22.987
AGND on Signal Layer 1 "AGND_L02_P057" (solid, pour order 57): 1.174,44.481 60.61,44.481 cw(c60.61,41.941) 63.15,41.941 63.15,35.21 cw(c61.626,35.21) 61.626,33.686 ccw(c61.626,32.416) 60.356,32.416 60.356,1.555 cw(c59.467,1.555) 59.467,0.666 1.428,0.666 cw(c1.428,1.428) 0.666,1.428 0.666,43.655 cw(c1.314,43.832) 1.138,44.481 2.063,44.481
GND on Signal Layer 1 "GND_L02_P058" (solid, pour order 58): 63.899,41.888 cw(c66.439,41.888) 66.439,44.428 114.953,44.428 cw(c114.953,41.888) 117.493,41.888 117.493,1.375 cw(c116.731,1.375) 116.731,0.613 70.122,0.613 cw(c70.122,3.153) 67.582,3.153 67.582,32.871 ccw(c66.82,32.871) 66.82,33.633 64.915,33.633 cw(c64.915,34.649) 63.899,34.649
AGND on Signal Layer 1 "Signal Layer 1-AGND" (solid, pour order 8): 19.177,36.068 cw(c21.59,36.068) 21.59,38.481 25.781,38.481 cw(c25.781,36.449) 27.813,36.449 27.813,23.495 cw(c25.273,23.495) 25.273,20.955 21.717,20.955 cw(c21.717,23.495) 19.177,23.495
AGND on Signal Layer 2 "AGND_L03_P053" (solid, pour order 53): 1.143,44.45 60.579,44.45 cw(c60.579,41.91) 63.119,41.91 63.119,35.179 cw(c61.595,35.179) 61.595,33.655 ccw(c61.595,32.385) 60.325,32.385 60.325,1.524 cw(c59.436,1.524) 59.436,0.635 1.397,0.635 cw(c1.397,1.397) 0.635,1.397 0.635,43.624 cw(c1.284,43.801) 1.107,44.45 2.032,44.45
GND on Signal Layer 2 "GND_L03_P052" (solid, pour order 52): 63.881,41.91 cw(c66.421,41.91) 66.421,44.45 114.935,44.45 cw(c114.935,41.91) 117.475,41.91 117.475,1.397 cw(c116.713,1.397) 116.713,0.635 70.104,0.635 cw(c70.104,3.175) 67.564,3.175 67.564,32.893 ccw(c66.802,32.893) 66.802,33.655 64.897,33.655 cw(c64.897,34.671) 63.881,34.671
AGND on Signal Layer 2 "Signal Layer 2-AGND" (solid, pour order 10): 19.177,35.941 cw(c21.717,35.941) 21.717,38.481 25.654,38.481 cw(c25.654,36.322) 27.813,36.322 27.813,23.495 cw(c25.273,23.495) 25.273,20.955 21.717,20.955 cw(c21.717,23.495) 19.177,23.495
AGND on Bottom Layer "AGND_L04_P050" (solid, remove dead copper, pour order 50): 1.143,44.45 60.579,44.45 cw(c60.579,41.91) 63.119,41.91 63.119,35.179 cw(c61.595,35.179) 61.595,33.655 ccw(c61.595,32.385) 60.325,32.385 60.325,1.524 cw(c59.436,1.524) 59.436,0.635 1.397,0.635 cw(c1.397,1.397) 0.635,1.397 0.635,43.624 cw(c1.284,43.801) 1.107,44.45 2.032,44.45
GND on Bottom Layer "GND_L04_P060" (solid, remove dead copper, pour order 60): 63.86,41.888 cw(c66.4,41.888) 66.4,44.428 114.914,44.428 cw(c114.914,41.888) 117.454,41.888 117.454,1.375 cw(c116.692,1.375) 116.692,0.613 70.083,0.613 cw(c70.083,3.153) 67.543,3.153 67.543,32.871 ccw(c66.781,32.871) 66.781,33.633 64.876,33.633 cw(c64.876,34.649) 63.86,34.649

## Keep-outs
Keep-Out Layer:
  rectangle: 60.25,6.75 67.5,17.5
  rectangle: 60.25,20.75 67.5,31.5
  lines w0.254: 0,0 0,45 118.25,45 118.25,0 0,0

## Other copper
Top Layer:
  rectangle net USBVCC: 9.906,3.785 11.913,9.652
  rectangle net USBVCC: 10.363,3.785 15.164,4.547

## Silkscreen, mask and mechanical layers (free items; w line width, h text height)
Top Overlay:
  lines w0.254: 71.25,34.25 76,34.25
  text "5V ISO" at 67.437,40.386 h1.52
  text "3V3 ISO" at 67.437,37.592 h1.52
  text "GND ISO" at 67.437,34.798 h1.52
  text "EMU1" at 85.515,29.718 h1.52
  text "EMU0" at 100.076,29.718 h1.52
  text "GND" at 86.06,27.174 h1.52
  text "TCK" at 100,27.166 h1.52
  text "NC" at 87.134,24.63 h1.52
  text "RTCK" at 100,24.614 h1.52
  text "GND" at 86.06,22.085 h1.52
  text "TDO" at 100,22.062 h1.52
  text "GND" at 86.06,19.541 h1.52
  text "3V3" at 100,19.523 h1.52
  text "GND" at 86.06,16.997 h1.52
  text "TDI" at 100,17.005 h1.52
  text "TRST" at 85.446,14.453 h1.52
  text "TMS" at 100,14.453 h1.52
Bottom Overlay:
  text "DOWN" at 91.187,36.017 h1.52 r270
  text "UP" at 92.759,36.017 h1.52 r270
  text "DOWN" at 95.912,36.017 h1.52 r270
  text "UP" at 97.465,36.017 h1.52 r270
  text "EMU1" at 89.407,32.361 h1.52 r270
  text "EMU0" at 99.465,32.361 h1.52 r270
  text "TCK" at 105.254,27.558 h1.52
  text "TDI" at 114.085,26.391 h1.52
  text "TMS" at 105.254,24.999 h1.52
  text "GND" at 114.879,23.793 h1.52
  text "TRST" at 105.254,22.44 h1.52
  text "GND" at 114.879,21.196 h1.52
  text "TDO" at 105.254,19.879 h1.52
  text "3V3" at 114.343,18.623 h1.52
  text "GND" at 105.256,17.321 h1.52
  text "GND" at 114.879,16.026 h1.52